# Altium PCB PCB2.PcbDoc
Units mil, origin at the board's own origin, x right, y up, seen from the top; angles counter-clockwise.
Board outline 3149.61 x 3937.01 mil, 2 copper layers (Top Layer, Bottom Layer); 72 components, 53 nets, 211 pads, 14 vias.
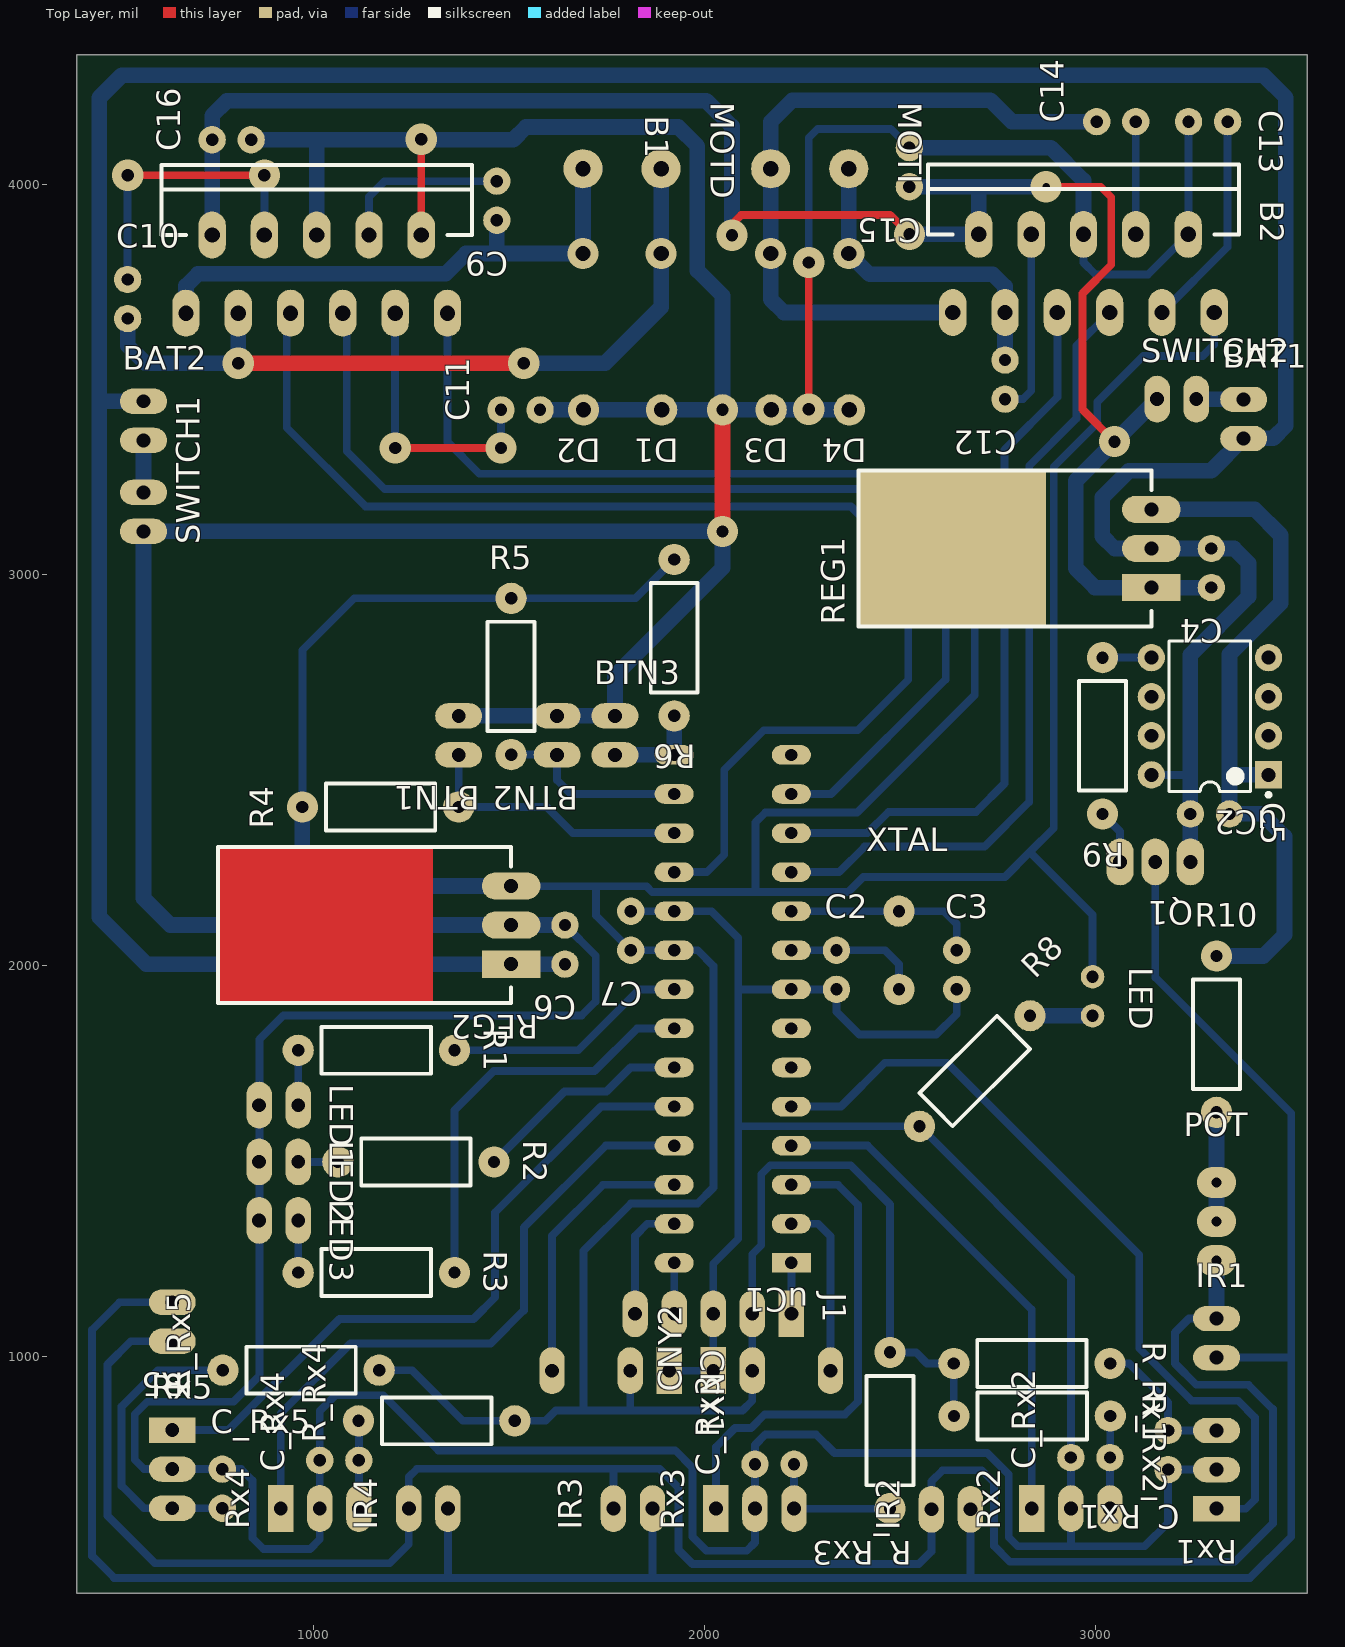
[diagram p0: Top Layer view]
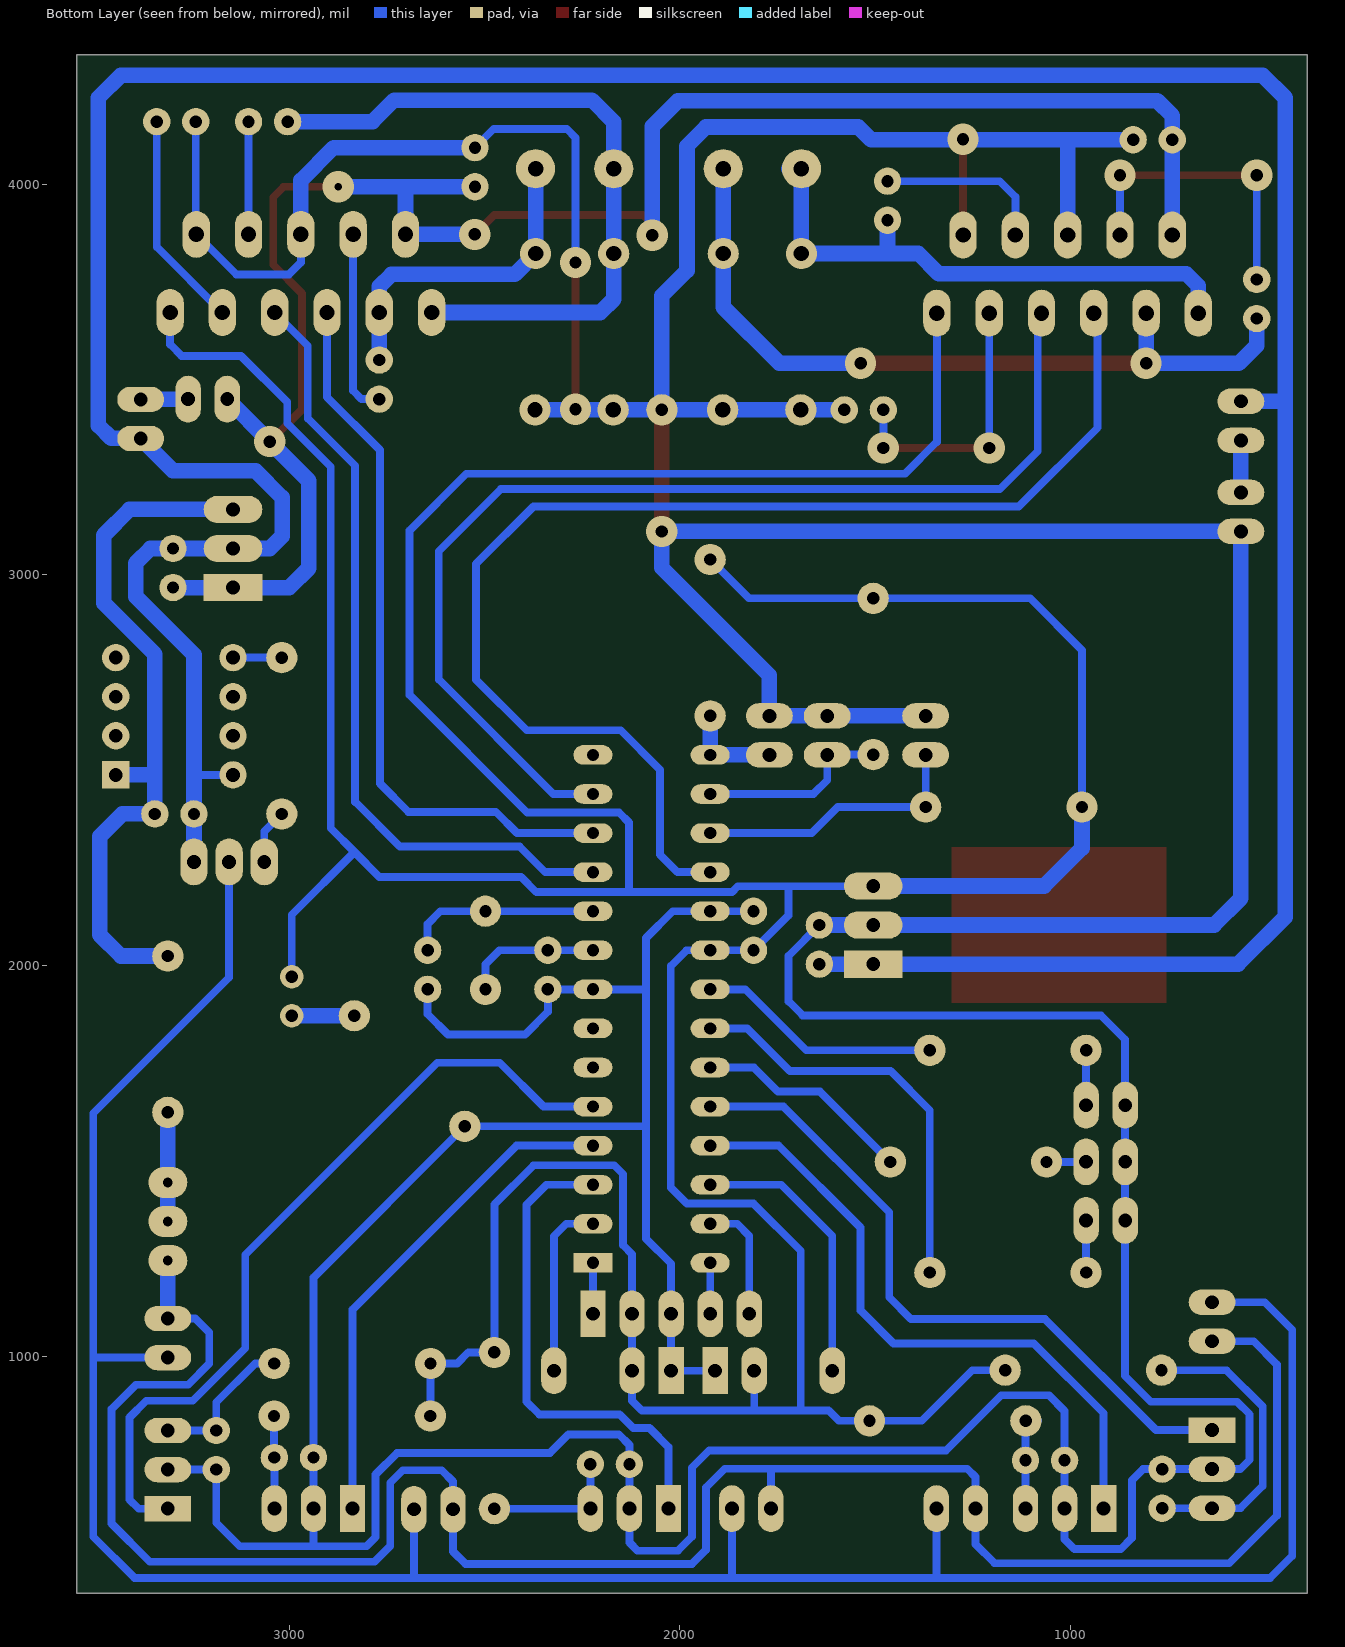
[diagram p1: Bottom Layer view, seen from below]
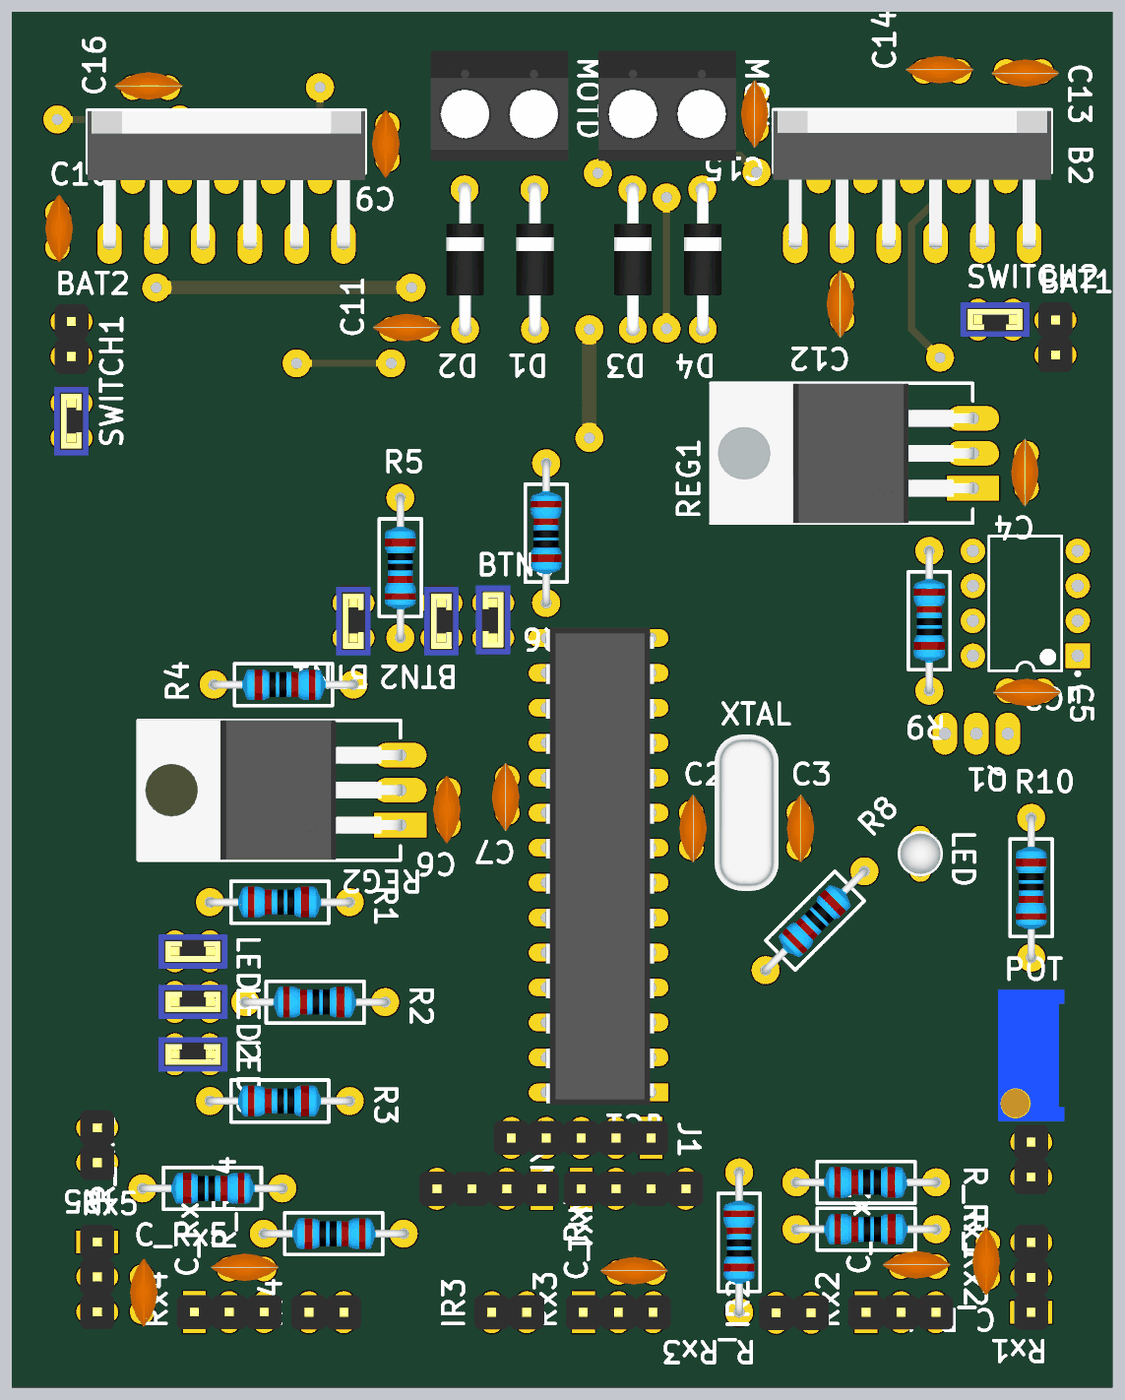
[diagram p2: 3D render of the assembled board from above, using the file's embedded part models]

## Layer stack, top to bottom
Top Solder: solder mask 0.4, Solder Resist, Dk 3.5
Top Layer: signal copper 1.4
Dielectric 1: dielectric 12.6, FR-4, Dk 4.8
Bottom Layer: signal copper 1.4
Bottom Solder: solder mask 0.4, Solder Resist, Dk 3.5

## Board outline
393.7,393.7 3543.31,393.7 3543.31,4330.71 393.7,4330.71

## Design rules (kind name [scope] priority, off if disabled: settings)
Clearance [All] p1: gap=10
HoleSize [All] p1: absolutevalues=TRUE maxlimit=100 minlimit=0 maxpercent=80.000 minpercent=20.000
PolygonConnect [All] p1: connectstyle=Relief reliefconductorwidth=10 reliefentries=4 polygonreliefangle="90 Angle" airgapwidth=10
RoutingVias [All] p1: holewidth=31.5 width=80 viastyle="Through Hole" minholewidth=0 minwidth=0 maxholewidth=100 maxwidth=100
SolderMaskExpansion [All] p1: expansion=4
Width [All] p1: maxlimit=50 minlimit=20 preferedwidth=30
29 further rules are at their usual default settings.

## Components (designator, comment, footprint, x,y, rotation, side; value= is the part's Value field where it differs from the comment)
B1 "L6203" MUTIWATT11 1007.48,3769.68 r0 top
B2 "L6203" MUTIWATT11 2970.08,3771.26 r0 top
BAT1 "" "HEADER 1x2" 3379.92,3398.82 r0 top
BAT2 "" "HEADER 1x2" 564.17,3394.09 r0 top
BTN1 "JUMPER" JUMPER 1370.87,2588.98 r180 top
BTN2 "JUMPER" JUMPER 1622.83,2588.98 r180 top
BTN3 "JUMPER" JUMPER 1770.87,2588.98 r0 top
C2 "CAP-CER" CAP-CER 2337.8,2003.98 r90 top
C3 "CAP-CER" CAP-CER 2645.67,2003.98 r90 top
C4 "CAP-CER" CAP-CER 3297.24,3002.32 r270 top
C5 "CAP-CER" CAP-CER 3308.66,2387.99 r0 top
C6 "CAP-CER" CAP-CER 1642.91,2038.54 r270 top
C7 "CAP-CER" CAP-CER 1811.42,2073.98 r270 top
C9 "CAP-CER" CAP-CER 1468.5,3942.48 r270 top
C10 "CAP-CER" CAP-CER 523.62,3720.91 r90 top
C11 "CAP-CER" CAP-CER 1514.17,3422.25 r180 top
C12 "CAP-CER" CAP-CER 2769.29,3484.61 r270 top
C13 "CAP-CER" CAP-CER 3303.94,4159.84 r0 top
C14 "CAP-CER" CAP-CER 3038.94,4159.84 r180 top
C15 "CAP-CER" CAP-CER 2524.41,4028.35 r270 top
C16 "CAP-CER" CAP-CER 774.76,4113.39 r180 top
C_Rx1 "CAP-CER" CAP-CER 3186.61,744.84 r270 top
C_Rx2 "CAP-CER" CAP-CER 2972.8,740.55 r180 top
C_Rx3 "CAP-CER" CAP-CER 2164.13,723.62 r180 top
C_Rx4 "CAP-CER" CAP-CER 1050.35,733.46 r180 top
C_Rx5 "CAP-CER" CAP-CER 765.75,676.02 r90 top
CNY1 "CNY_HEADER" CNY_HEADER 1759.84,962.99 r270 top
CNY2 "CNY_HEADER" CNY_HEADER 2172.44,962.99 r90 top
D1 "DIODE" DO-41 1888.98,3647.24 r270 top
D2 "DIODE" DO-41 1688.98,3647.24 r270 top
D3 "DIODE" DO-41 2169.29,3647.24 r270 top
D4 "DIODE" DO-41 2369.29,3647.24 r270 top
IR1 "" "HEADER 1x2" 3310.63,1046.46 r0 top
IR2 "" "HEADER 1x2" 2630.71,608.27 r90 top
IR3 "" "HEADER 1x2" 1816.93,609.84 r90 top
IR4 "" "HEADER 1x2" 1293.31,609.84 r90 top
IR5 "" "HEADER 1x2" 637.8,1088.19 r180 top
J1 "" "Header 1x5" 2222.44,1108.66 r270 top
LED "LED" LED-3MM-RED 2993.31,1921.43 r270 top
LED1 "JUMPER" JUMPER 910.24,1642.52 r270 top
LED2 "JUMPER" JUMPER 910.24,1497.64 r270 top
LED3 "JUMPER" JUMPER 910.24,1347.64 r270 top
MOTD "2-BLOCK_TERMINAL" BLOCK_TERMINAL-2 1738.98,4484.37 r270 top
MOTI "2-BLOCK_TERMINAL" BLOCK_TERMINAL-2 2219.29,4484.37 r270 top
POT "POT" POT-10TURN 3310.63,1344.88 r90 top
Q1 "BD139" TO-126 3153.66,2265.16 r180 top
R1 "RES" RES-Axial-400mil 960.24,1783.07 r0 top
R2 "RES" RES-Axial-400mil 1061.42,1497.24 r0 top
R3 "RES" RES-Axial-400mil 960.24,1214.17 r0 top
R4 "RES" RES-Axial-400mil 1370.87,2405.51 r180 top
R5 "RES" RES-Axial-400mil 1505.12,2539.76 r90 top
R6 "RES" RES-Axial-400mil 1922.44,3038.98 r270 top
R8 "RES" RES-Axial-400mil 2550.46,1588.58 r45 top
R9 "RES" RES-Axial-400mil 3018.9,2787.99 r270 top
R10 "" RES-Axial-400mil 3310.63,1624.21 r90 top
R_Rx1 "RES" RES-Axial-400mil 2638.19,981.5 r0 top
R_Rx2 "RES" RES-Axial-400mil 2638.58,847.24 r0 top
R_Rx3 "RES" RES-Axial-400mil 2474.8,1009.84 r270 top
R_Rx4 "RES" RES-Axial-400mil 1514.57,834.65 r180 top
R_Rx5 "RES" RES-Axial-400mil 1167.32,964.17 r180 top
REG1 "LM7805" TO-220-FLAT#1 3143.7,2967.32 r180 top
REG2 "LM7805" TO-220-FLAT#2 1505.12,2003.54 r180 top
Rx1 "Header 1x3" "Header 1x3" 3310.63,609.84 r180 top
Rx2 "Header 1x3" "Header 1x3" 2837.8,609.84 r90 top
Rx3 "Header 1x3" "Header 1x3" 2029.13,609.84 r90 top
Rx4 "Header 1x3" "Header 1x3" 915.35,610.24 r90 top
Rx5 "Header 1x3" "Header 1x3" 637.8,811.02 r0 top
SWITCH1 "JUMPER" JUMPER 564.17,3161.02 r180 top
SWITCH2 "JUMPER" JUMPER 3208.62,3449.61 r90 top
uC1 "PIC18F2550" DIP28 2222.44,1238.98 r180 top
uC2 "PIC12F683-I/P" PDIP300-P8 3293.7,2637.99 r180 top
XTAL "" CRYSTAL-TH 2497.64,2018.98 r90 top

## Footprints (in the part's own frame and the unit in brackets; to place one, negate y for a bottom-side part, rotate by r counter-clockwise, add the part's x,y. Pads: shape width x height; smd on the part's side, far side on the other; paste and mask are expansions set on the pad)
BLOCK_TERMINAL-2 [mil]
  round 100 hole 39.37: 1(445,150) 2(445,-50)
  body extent 265,-147 580,247, height 400
CAP-CER [mil]
  round 70 hole 31.5: 1(-65,0) 2(35,0)
  body extent -107,-44 87,34, height 207
CNY_HEADER [mil]
  rect 120x65 hole 35.43: 1(0,150)
  oval 120x65 hole 35.43: 2(0,50) 3(0,-150)
  body extent -49,-200 49,200, height 336
CRYSTAL-TH [mil]
  round 80 hole 31.5: 1(-80,0) 2(120,0)
  body extent -203,-90 243,93, height 138
DIP28 [mm]
  rect 2.54x1.27 hole 0.8: 1(0,0)
  oval 2.54x1.27 hole 0.8: 2(0,-2.54) 3(0,-5.08) 4(0,-7.62) 5(0,-10.16) 6(0,-12.7) 7(0,-15.24) 8(0,-17.78) 9(0,-20.32) 10(0,-22.86) 11(0,-25.4) 12(0,-27.94) 13(0,-30.48) 14(0,-33.02) 15(7.62,-33.02) 16(7.62,-30.48) 17(7.62,-27.94) 18(7.62,-25.4) 19(7.62,-22.86) 20(7.62,-20.32) 21(7.62,-17.78) 22(7.62,-15.24) 23(7.62,-12.7) 24(7.62,-10.16) 25(7.62,-7.62) 26(7.62,-5.08) 27(7.62,-2.54) 28(7.62,0)
  body extent -0.25,-33.76 7.65,0.89, height 5.09
DO-41 [mil]
  round 80 hole 39.37: A(224.99,1.45) K(-175,0)
  body extent -192,-52 242,55, height 107
"HEADER 1x2" [mil]
  oval 120x65 hole 35.43: 1(0,50) 2(0,-50)
  body extent -49,-100 49,100, height 336
"Header 1x3" [mil]
  rect 120x65 hole 35.43: 1(0,0)
  oval 120x65 hole 35.43: 2(0,-100) 3(0,-200)
  body extent -49,-250 49,50, height 336
"Header 1x5" [mil]
  rect 120x65 hole 35.43: 1(0,0)
  oval 120x65 hole 35.43: 2(0,-100) 3(0,-200) 4(0,-300) 5(0,-400)
  body extent -49,-450 49,50, height 336
JUMPER [mil]
  oval 120x65 hole 35.43: 1(0,50) 2(0,-50)
  body extent -49,-100 49,100, height 350
LED-3MM-RED [mil]
  round 60 hole 31.5: A(-50,0) K(50,0)
  body extent -66,-65 64,65, height 217
MUTIWATT11 [mil]
  oval 70x120 hole 39.37: 1(-334.65,-100) 2(-267.72,100) 3(-200.79,-100) 4(-133.86,100) 5(-66.93,-100) 6(0,100) 7(66.93,-100) 8(133.86,100) 9(200.79,-100) 10(267.72,100) 11(334.65,-100)
  silkscreen extent -398,100 398,279, body extent -398,-114 398,276, height 858
PDIP300-P8 [mil] "DIP, 8-Leads, Row Spacing 7.62mm, Pitch 2.54mm, Body 9.5x6.6mm"
  rect 70x70 hole 35.43: 1(-150,150)
  round 70 hole 35.43: 2(-150,50) 3(-150,-50) 4(-150,-150) 5(150,-150) 6(150,-50) 7(150,50) 8(150,150)
  silkscreen extent -155,-193 104,206, body extent -140,-193 140,193, height 210
POT-10TURN [mil]
  oval 80x100 hole 25: 1(-100,0) 2(0,0) 3(100,0)
  body extent -188,-94 188,94, height 455
RES-Axial-400mil [mil]
  round 80 hole 31.5: 1(0,0) 2(400,0)
  silkscreen extent 60,-60 340,60, body extent -12,-44 410,44, height 94
TO-126 [mil]
  oval 70x120 hole 35.43: 1(-90,0) 2(0,0) 3(90,0)
  body extent -157,-49 157,61, height 590
TO-220-FLAT#1 [mil]
  rect 150x70 hole 35.43: 1(0,0)
  oval 150x70 hole 35.43: 2(0,-100) 3(0,-200)
  rect 480x400 smd: ""(510,-100)
  round 0 all layers, no hole: ""(650,-100)
  silkscreen extent 0,-300 750,100, body extent -5,-300 755,100, height 195
TO-220-FLAT#2 [mil]
  rect 150x70 hole 35.43: 1(0,0)
  oval 150x70 hole 35.43: 2(0,-100) 3(0,-200)
  Top Layer region: 200,-300 750,-300 750,100 200,100
  silkscreen extent 0,-300 750,100, body extent -5,-300 755,100, height 195

## Part data
B1 B2: "DC motor controller,L6203 0-48V STMicroelectronics L6203, Motor Controller Full Bridge Motor,, 11-Pin MULTIWATT V"
BAT1 BAT2 IR1 IR2 IR3 IR4 IR5: library part "Header 1x2"
J1: library part "Header Programmer"
Q1: library part NPN
R10: library part RES
REG1 REG2: library part LM78XX
uC2: "Flash-Based 8-Bit CMOS Microcontroller with nanoWatt Technology, 2K (x14-Bit words) Program Memory, 384 Bytes Data Memory, 8-Pin PDIP, Industrial Temperature"
XTAL: library part XTAL

## Free pads (board coordinates)
  round 80 hole 31.5: 2(2046.06,3422.25)

## Via types
v1: diameter 80, hole 31.5, Top Layer to Bottom Layer, 13 vias
v2: diameter 80, hole 19.68, Top Layer to Bottom Layer, 1 vias

## Nets (pads, with @x,y where several pads share a name; then routed paths per layer and width w, separated by ;. In a path a pad name is that pad's centre, name@x,y a point inside that pad or via, vN(x,y) a via of type N, cw(c..) or ccw(c..) an arc to the next point about the centre after c; other vN are vias at no path point)
38K: R9.1 uC2.5 | length 124.8
  Bottom Layer w20: R9.1 uC2.5
BAT1: B1.2 B2.2 C4.2 C15.2 C16.2 REG1.1 SWITCH2.1 | length 4911.3
  Top Layer w20: v1@2044.09,3883.86 2059.06,3868.9 v1(2070.47,3868.9) 2070.47,3897.64 2093.7,3920.87 2475.2,3920.87 v1(2524.8,3871.26) ; v2(2874.37,3993.35) 3014.13,3993.35 3040.94,3966.54 3040.94,3793.7 2967.32,3720.08 2967.32,3423.23 v1(3049.61,3340.94)
  Bottom Layer w20: v1@3049.61,3337.8 3049.61,3340.59 v1(3049.61,3340.94)
  Bottom Layer w40: B1.2 C16.2 739.76,4175.2 777.95,4213.39 2004.72,4213.39 2070.47,4147.64 v1(2070.47,3868.9) ; C15.2 2702.36,3993.35 ; v1(2524.8,3871.26) B2.2 2702.36,3993.35 ; v2(2874.37,3993.35) 2702.36,3993.35 ; SWITCH2.1 3049.61,3340.59 2950,3240.98 2950,3016.93 2999.61,2967.32 REG1.1 C4.2
BAT2: BAT1.2 BAT2.1 C4.1 C5.1 C6.2 Q1.1 REG1. REG1.2 REG2.1 uC2.8 | length 9351.4
  Bottom Layer w20: uC2.8 3243.66,2487.99
  Bottom Layer w40: BAT2.1 450.79,3444.09 ; C6.2 REG2.1 571.26,2003.54 450.79,2124.02 450.79,3444.09 ; Q1.1 C5.1 3243.66,2487.99 3243.66,2795.63 3392.52,2944.49 3392.52,3029.92 3355.12,3067.32 C4.1 REG1.2 3049.61,3067.32 3018.11,3098.82 3018.11,3198.03 3086.22,3266.14 3297.24,3266.14 BAT1.2 3380.71,3349.61 3455.51,3349.61 3488.19,3382.28 3488.19,4221.26 3430.71,4278.74 508.66,4278.74 450.79,4220.87 450.79,3444.09
BTN1: BTN1.1 R4.1 uC1.17 | length 712.6
  Bottom Layer w20: BTN1.1 R4.1 1596.06,2405.51 1662.6,2338.98 uC1.17
BTN2: BTN2.1 R5.1 uC1.16 | length 496.9
  Bottom Layer w20: R5.1 1622.05,2539.76 BTN2.1 1622.83,2474.41 1658.27,2438.98 uC1.16
BTN3: BTN3.2 R6.2 uC1.15 | length 251.6
  Bottom Layer w40: BTN3.2 uC1.15 R6.2
CNY1: CNY1.3 uC1.26 | length 712
  Bottom Layer w20: CNY1.3 1609.84,1308.27 1740.55,1438.98 uC1.26
CNY2: CNY2.3 uC1.2 | length 457.3
  Bottom Layer w20: uC1.2 2290.55,1338.98 2322.44,1307.09 CNY2.3
GND: B1.6 B1.10 B2.6 B2.10 BTN1.2 BTN2.2 BTN3.1 C2.1 C3.1 C6.1 C7.1 C11.1 C13.1 C15.1 C16.1 C_Rx1.2 C_Rx2.2 C_Rx3.2 C_Rx4.2 C_Rx5.2 CNY1.1 CNY2.1 D1.A D2.A D3.A D4.A J1.3 LED1.2 LED2.2 LED3.2 pad.2 R8.1 REG2.2 Rx1.2 Rx2.2 Rx3.2 Rx4.2 Rx5.2 SWITCH1.1 uC1.8 uC1.19 | length 20924.2
  Top Layer w20: B1.10 v1(1275.2,4114.57) ; v1(2266.93,3424.02) v1(2266.93,3799.21)
  Top Layer w40: v1(2046.06,3111.02) 2046.06,3419.89 2044.88,3421.07 pad.2
  Bottom Layer w20: v1@1274.41,4115.35 v1(1275.2,4114.57) ; C6.1 1721.65,2024.8 1721.65,1908.27 1685.83,1872.44 922.44,1872.44 861.02,1811.02 861.02,950 794.49,883.46 574.02,883.46 541.73,851.18 541.73,735.04 565.75,711.02 Rx5.2 C_Rx5.2 814.57,711.02 842.91,682.68 842.91,535.04 871.65,506.3 990.16,506.3 1015.35,531.5 Rx4.2 C_Rx4.2 1015.35,859.92 1055.43,900 1177.56,900 1318.5,759.06 1924.8,759.06 1969.29,714.57 1969.29,538.19 2005.12,502.36 2108.27,502.36 2129.13,523.23 Rx3.2 C_Rx3.2 2129.13,772.83 2156.3,800 2285.04,800 2332.68,752.36 2723.62,752.36 2778.82,697.17 2778.82,536.93 2801.97,513.78 2937.8,513.78 ; C7.1 uC1.19 2018.11,2138.98 2086.61,2070.47 2086.61,1938.98 ; CNY1.1 CNY2.1 J1.3 2022.44,1236.61 2086.61,1300.79 2086.61,1588.58 ; v1(2266.93,3799.21) 2266.93,4118.5 2289.76,4141.34 2476.42,4141.34 C15.1 ; C3.1 2645.67,1875.59 2593.31,1823.23 2396.06,1823.23 2337.8,1881.5 C2.1 uC1.8 2086.61,1938.98 ; B2.6 2970.08,3799.21 3000.39,3768.9 3135.43,3768.9 B2.10 3238.94,3872.4 C13.1 ; Rx1.2 C_Rx1.2 3186.61,574.02 3126.38,513.78 2937.8,513.78 ; 2086.61,1588.58 R8.1 2555.74,1583.3 2937.8,1201.24 C_Rx2.2 Rx2.2 2937.8,513.78 ; 2086.61,1588.58 2086.61,1938.98
  Bottom Layer w40: C16.1 1007.48,4113.39 ; B1.6 1007.48,4113.39 ; v1@1274.41,4113.39 1007.48,4113.39 ; v1@1275.2,4113.39 1510.63,4113.39 1543.31,4146.06 1933.07,4146.06 1981.89,4097.24 1981.89,3778.74 2046.06,3714.57 pad.2 ; BTN1.2 BTN2.2 BTN3.1 1770.87,2742.52 2046.06,3017.72 v1(2046.06,3111.02) SWITCH1.1 564.17,2172.05 632.68,2103.54 REG2.2 C6.1 ; C11.1 D2.A pad.2 ; v1@2266.93,3422.25 pad.2 ; v1@2268.11,3422.25 D4.A ; C15.1 2886.18,4093.35 2970.08,4009.45 B2.6
IR1: Rx1.1 uC1.5 | length 2067
  Bottom Layer w20: uC1.5 2349.21,1638.98 2461.42,1751.18 2620.87,1751.18 3112.6,1259.45 3112.6,1020.47 3246.85,886.22 3365.75,886.22 3408.66,843.31 3408.66,633.07 3385.04,609.45 3311.02,609.45 Rx1.1
IR2: Rx2.1 uC1.4 | length 1298.6
  Bottom Layer w20: uC1.4 2418.11,1538.98 2837.8,1119.29 Rx2.1
IR3: Rx3.1 uC1.3 | length 1264.4
  Bottom Layer w20: Rx3.1 2029.13,767.32 2077.95,816.14 2119.29,816.14 2154.33,851.18 2359.84,851.18 2392.52,883.86 2392.52,1387.8 2341.34,1438.98 uC1.3
IR4: Rx4.1 uC1.25 | length 1658.8
  Bottom Layer w20: Rx4.1 915.35,853.94 1094.09,1032.68 1453.15,1032.68 1537.8,1117.32 1537.8,1329.53 1747.24,1538.98 uC1.25
IR5: Rx5.1 uC1.24 | length 1754.9
  Bottom Layer w20: Rx5.1 781.5,811.02 1065.75,1095.28 1408.66,1095.28 1464.17,1150.79 1464.17,1368.11 1735.04,1638.98 uC1.24
LED1: R1.2 uC1.21 | length 626.8
  Bottom Layer w20: R1.2 1676.77,1783.07 1832.68,1938.98 uC1.21
LED2: R2.2 uC1.23 | length 561.2
  Bottom Layer w20: R2.2 1641.73,1677.56 1749.21,1677.56 1810.63,1738.98 uC1.23
LED3: R3.2 uC1.22 | length 1064.3
  Bottom Layer w20: R3.2 1360.24,1629.53 1460.63,1729.92 1718.5,1729.92 1827.56,1838.98 uC1.22
M1_D: B1.5 uC1.18 | length 3241.5
  Bottom Layer w20: B1.5@930.71,3655.91 930.71,3376.77 1132.68,3174.8 2374.8,3174.8 2521.65,3027.95 2521.65,2731.5 2392.13,2601.97 2151.57,2601.97 2050.79,2501.18 2050.79,2283.86 2005.91,2238.98 uC1.18
M1_P: B1.7 uC1.13 | length 2822.9
  Bottom Layer w20: B1.7@1084.25,3655.91 1084.25,3316.54 1181.5,3219.29 2458.27,3219.29 2617.32,3060.24 2617.32,2732.28 2324.02,2438.98 uC1.13
M1A: B1.1 C9.2 D2.K MOTD.2 | length 1435.7
  Bottom Layer w40: B1.1 672.83,3739.37 703.54,3770.08 1337.4,3770.08 1389.57,3822.24 1468.5,3822.24 ; C9.2 1468.5,3822.24 ; MOTD.2@1720.87,4039.37 1688.98,4007.48 D2.K 1468.5,3822.24
M1B: B1.3 C10.1 D1.K MOTD.1 | length 1963.5
  Top Layer w40: v1(806.69,3541.34) v1(1537.4,3541.34)
  Bottom Layer w40: C10.1 523.62,3587.01 569.29,3541.34 v1(806.69,3541.34) B1.3 ; v1(1537.4,3541.34) 1745.28,3541.34 1888.98,3685.04 D1.K MOTD.1@1888.98,4007.48
M2_D: B2.7 uC1.11 | length 2020.4
  Bottom Layer w20: uC1.11 2344.49,2238.98 2409.84,2304.33 2716.54,2304.33 2831.1,2418.9 2831.1,3279.13 2952.36,3400.39 2952.36,3586.22 B2.7@3037.01,3670.87
M2_P: B2.5 uC1.12 | length 1855.5
  Bottom Layer w20: uC1.12 2416.93,2338.98 2471.26,2393.31 2695.28,2393.31 2767.72,2465.75 2767.72,3319.29 2903.15,3454.72 2903.15,3657.48 B2.5@2893.31,3657.48
M2A: B2.1 C14.2 D3.K MOTI.2 | length 1814.5
  Bottom Layer w40: B2.1 2203.54,3671.26 2169.29,3705.51 D3.K MOTI.2 2169.29,4159.06 2225.2,4214.96 2731.5,4214.96 2786.61,4159.84 C14.2
M2B: B2.3 C12.1 D4.K MOTI.1 | length 840.3
  Bottom Layer w40: MOTI.1 D4.K 2422.64,3768.9 2738.19,3768.9 2769.29,3737.8 B2.3 C12.1
MCLR: J1.1 uC1.1 | length 130.3
  Bottom Layer w20: J1.1 uC1.1
NetB1_4: B1.4 C10.2 | length 769.3
  Top Layer w20: v1(523.62,4022.44) v1(873.62,4022.44)
  Bottom Layer w20: C10.2 v1(523.62,4022.44) ; B1.4 v1(873.62,4022.44)
NetB1_8: B1.8 C9.1 | length 489.2
  Bottom Layer w20: B1.8@1161.02,3869.69 1141.34,3850 B1.8 1141.34,3967.72 1181.1,4007.48 C9.1
NetB1_9: B1.9 C11.2 | length 710.5
  Top Layer w20: v1@1210.24,3324.8 v1(1479.17,3324.8)
  Bottom Layer w20: B1.9 1208.27,3326.77 v1@1210.24,3324.8 ; v1@1479.17,3326.42 C11.2
  other v1: 1208.27,3324.8
NetB2_4: B2.4 C12.2 | length 476.1
  Bottom Layer w20: C12.2 2814.96,3449.61 2836.22,3470.87 B2.4
NetB2_8: B2.8 C14.1 | length 288.6
  Bottom Layer w20: B2.8 C14.1
NetB2_9: B2.9 C13.2 | length 558.2
  Bottom Layer w20: B2.9 3338.94,3839.33 C13.2
NetBAT1_1: BAT1.1 SWITCH2.2 | length 121.3
  Bottom Layer w40: SWITCH2.2 BAT1.1@3379.92,3449.61
NetBAT2_2: BAT2.2 SWITCH1.2 | length 133.1
  Bottom Layer w40: SWITCH1.2 BAT2.2
NetC_Rx1_1: C_Rx1.1 R_Rx1.2 Rx1.3 | length 385.7
  Bottom Layer w20: R_Rx1.2 3087.01,981.5 3186.61,881.89 C_Rx1.1 Rx1.3
NetC_Rx2_1: C_Rx2.1 R_Rx2.2 Rx2.3 | length 237.7
  Bottom Layer w20: Rx2.3 C_Rx2.1 3038.58,741.34 R_Rx2.2
NetC_Rx3_1: C_Rx3.1 R_Rx3.2 Rx3.3 | length 359.4
  Bottom Layer w20: C_Rx3.1 Rx3.3 R_Rx3.2
NetC_Rx4_1: C_Rx4.1 R_Rx4.2 Rx4.3 | length 224.7
  Bottom Layer w20: R_Rx4.2@1083.07,835.43 R_Rx4.2@1083.86,834.65 ; Rx4.3 C_Rx4.1 R_Rx4.2@1115.35,833.86
NetC_Rx5_1: C_Rx5.1 R_Rx5.2 Rx5.3 | length 784.7
  Bottom Layer w20: R_Rx5.2@765.35,952.36 753.54,964.17 601.18,964.17 508.27,871.26 508.27,668.11 565.35,611.02 Rx5.3 C_Rx5.1
NetIR1_1: IR1.1 IR2.1 IR3.1 IR4.1 IR5.1 POT.1 | length 5485.7
  Bottom Layer w20: IR5.1 531.5,1038.19 472.05,978.74 472.05,591.73 593.7,470.08 1194.49,470.08 1243.31,518.9 IR4.1 1243.31,690.94 1264.57,712.2 1766.93,712.2 ; IR3.1 1766.93,712.2 ; IR1.1 3240.16,1096.46 3204.33,1060.63 3204.33,981.5 3258.66,927.17 3392.13,927.17 3454.72,864.57 3454.72,572.05 3356.77,474.09 2781.42,474.09 2741.34,514.17 2741.34,676.38 2709.45,708.27 2609.45,708.27 2580.71,679.53 IR2.1 2580.71,500.39 2548.43,468.11 1969.29,468.11 1933.46,503.94 1933.46,663.78 1885.04,712.2 1766.93,712.2
  Bottom Layer w40: IR1.1 POT.1
NetIR1_2: IR1.2 IR2.2 IR3.2 IR4.2 IR5.2 Q1.2 | length 6545.7
  Bottom Layer w20: IR5.2 503.15,1138.19 432.68,1067.72 432.68,488.98 488.98,432.68 1343.31,432.68 ; IR4.2 1343.31,432.68 ; IR3.2 1866.93,432.68 ; 2676.38,432.68 1866.93,432.68 ; IR2.2@2698.82,609.84 2680.71,591.73 2680.71,432.68 3396.06,432.68 3501.57,538.19 3501.57,996.46 ; Q1.2 3153.66,1969.57 3501.57,1621.65 3501.57,996.46 ; IR1.2 3501.57,996.46 ; 1343.31,432.68 1866.93,432.68
NetLED1_1: LED1.1 R1.1 | length 140.6
  Bottom Layer w20: LED1.1 R1.1
NetLED2_1: LED2.1 R2.1 | length 101.3
  Bottom Layer w20: LED2.1 960.63,1497.24 R2.1
NetLED3_1: LED3.1 R3.1 | length 133.5
  Bottom Layer w20: R3.1 LED3.1
NetLED_K: LED.K R8.2 | length 160
  Bottom Layer w40: R8.2 LED.K
NetPOT_2: POT.2 POT.3 R10.1 | length 279.3
  Bottom Layer w40: POT.2 R10.1
NetQ1_B: Q1.3 R9.2 | length 141.4
  Bottom Layer w20: R9.2 3063.66,2343.23 Q1.3
PGC: J1.5 uC1.27 | length 312.1
  Bottom Layer w20: J1.5 1822.44,1307.87 1853.54,1338.98 uC1.27
PGD: J1.4 uC1.28 | length 130.3
  Bottom Layer w20: J1.4 uC1.28
VCC: B1.11 B2.11 C7.2 CNY1.2 CNY2.2 J1.2 LED.A R4.2 R5.2 R6.1 R_Rx1.1 R_Rx2.1 R_Rx3.1 R_Rx4.1 R_Rx5.1 REG2.3 uC1.20 | length 13225.6
  Bottom Layer w20: R4.2 970.87,2807.09 1103.54,2939.76 R5.2 1823.23,2939.76 R6.1 ; R_Rx5.1@1165.35,952.36 1177.17,964.17 1251.57,964.17 1381.1,834.65 R_Rx4.1 1592.91,834.65 1619.29,861.02 1690.55,861.02 ; B1.11 1342.13,3340.16 1423.62,3258.66 2546.46,3258.66 2691.73,3113.39 2691.73,2692.52 2390.55,2391.34 2155.51,2391.34 2130.32,2366.14 2130.32,2187.8 ; REG2.3@1505.12,2202.76 1722.05,2202.76 ; CNY1.2 1809.84,861.02 ; R_Rx2.1 2638.19,847.64 R_Rx1.1 2569.68,981.5 2541.34,1009.84 R_Rx3.1 2474.8,1388.19 2374.41,1488.58 2168.11,1488.58 2145.28,1465.75 2145.28,1283.86 2122.44,1261.02 J1.2 CNY2.2 2122.44,886.22 2097.24,861.02 1809.84,861.02 ; LED.A 2993.3,2129.92 2832.87,2290.35 ; B2.11 3304.72,3589.76 3275.2,3560.24 3123.23,3560.24 3005.12,3442.13 3005.12,3388.19 2893.7,3276.77 2893.7,2351.18 2832.87,2290.35 ; 1690.55,861.02 1690.55,1269.68 1811.42,1390.55 1981.89,1390.55 2023.23,1431.89 2023.23,1998.43 1982.68,2038.98 uC1.20 C7.2 1722.05,2128.35 1722.05,2202.76 ; 1690.55,861.02 1809.84,861.02 ; 1722.05,2202.76 1851.57,2202.76 1866.54,2187.8 2130.32,2187.8 ; 2130.32,2187.8 2367.32,2187.8 2406.3,2226.77 2769.29,2226.77 2832.87,2290.35
  Bottom Layer w40: R4.2 970.87,2300.39 1067.72,2203.54 REG2.3
VIR: C5.2 R10.2 REG1.3 uC2.1 | length 1839.3
  Bottom Layer w40: REG1.3 3408.66,3167.32 3474.8,3101.18 3474.8,2927.95 3343.66,2796.81 3343.66,2487.99 ; R10.2 3430.51,2024.21 3484.65,2078.35 3484.65,2330.31 3426.97,2387.99 C5.2 3343.66,2487.99 ; uC2.1 3343.66,2487.99
XTAL1: C2.2 uC1.9 XTAL.1 | length 354.2
  Bottom Layer w20: uC1.9 C2.2 2461.81,2038.98 2497.64,2003.15 XTAL.1
XTAL2: C3.2 uC1.10 XTAL.2 | length 504.1
  Bottom Layer w20: uC1.10 XTAL.2 2612.99,2138.98 2645.67,2106.3 C3.2
pads on no net: uC1.6 uC1.7 uC1.14 uC2.2 uC2.3 uC2.4 uC2.6 uC2.7

## Silkscreen, mask and mechanical layers (free items; w line width, h text height)
Mechanical 1:
  the board outline again, w20